# EAGLE board Máquina café (EAGLE 9.7.0)

Size 221.12 x 183.29 mm. Coordinates in mm from the lower left corner, seen from the top.
Outline: 0,0 221.12,0 221.12,183.29 0,183.29 0,0
Copper layers (1*16): Top 0.035mm / dielectric 1.5mm / Bottom 0.035mm
Design rules "default": minimum track width 6mil, minimum drill 0.35mm, track to track 6mil, track to pad 6mil, pad to pad 6mil, via to via 6mil, smd to smd 6mil, copper to edge 40mil, drill to drill 6mil, minimum pad ring 10mil, minimum via ring 8mil, stop-mask expansion 4mil, vias tented up to drill 0mil, thermal gap 10mil

## Footprints (pad centres in the part's own frame; a part is rotated, then mirrored left to right if it is on the bottom)
LEDRD254W60D565H860B = drill 0.981 pad 1.581: 1 -1.27,0; 2 1.27,0
RESAD1016W63L850D250B = drill 0.83 pad 1.43: 1 -5.08,0; 2 5.08,0
SWITCH-MOMENTARY-PTH-6.5MM = drill 1.016 pad 1.88: 1 -3.251,2.261; 2 3.251,2.261; 3 -3.251,-2.261; 4 3.251,-2.261
ARDUINO-UNO-R3-SHIELD = drill 1.016 pad 1.88: 3.3V 24.13,-2.54; 5V 24.13,0; A0 24.13,12.7; A1 24.13,15.24; A2 24.13,17.78; A3 24.13,20.32; A4 24.13,22.86; A5 24.13,25.4; AREF -24.13,-13.97; D2 -24.13,20.32; D3 -24.13,17.78; D4 -24.13,15.24; D5 -24.13,12.7; D6 -24.13,10.16; D7 -24.13,7.62; D8 -24.13,3.81; D9 -24.13,1.27; D10 -24.13,-1.27; D11 -24.13,-3.81; D12 -24.13,-6.35; D13 -24.13,-8.89; GND@0 24.13,2.54; GND@1 24.13,5.08; GND@2 -24.13,-11.43; IOREF 24.13,-7.62; NC 24.13,-10.16; RES 24.13,-5.08; RX -24.13,25.4; SCL -24.13,-19.05; SDA -24.13,-16.51; TX -24.13,22.86; VIN 24.13,7.62
DIP762W53P254L1969H508Q14B = drill 0.743 pad 1.343: 1 -3.81,7.62; 2 -3.81,5.08; 3 -3.81,2.54; 4 -3.81,0; 5 -3.81,-2.54; 6 -3.81,-5.08; 7 -3.81,-7.62; 8 3.81,-7.62; 9 3.81,-5.08; 10 3.81,-2.54; 11 3.81,0; 12 3.81,2.54; 13 3.81,5.08; 14 3.81,7.62

## Placement (x,y rotation side)
D1  RED  [LEDRD254W60D565H860B]  190.45,100.82 0 top
D2  RED  [LEDRD254W60D565H860B]  213.52,21.67 0 top
R1  1k  [RESAD1016W63L850D250B]  184.1,98.28 0 top
R2  1k  [RESAD1016W63L850D250B]  212.04,88.12 90 top
R3  1k  [RESAD1016W63L850D250B]  123.35,8.97 270 top
R4  1k  [RESAD1016W63L850D250B]  214.79,8.97 90 top
S1  SWITCH_MOMENTARY  [SWITCH-MOMENTARY-PTH-6.5MM]  209.5,104.63 90 top
S2  SWITCH_MOMENTARY  [SWITCH-MOMENTARY-PTH-6.5MM]  113.19,25.48 90 top
U1  ARDUINO-UNO-R3-SHIELD  [ARDUINO-UNO-R3-SHIELD]  115.6,153.44 270 top
U2  ARDUINO-UNO-R3-SHIELD  [ARDUINO-UNO-R3-SHIELD]  47.88,35.3 270 top
U3  74HC74_PDIP  [DIP762W53P254L1969H508Q14B]  163.78,104.63 90 top
U4  74HC74_PDIP  [DIP762W53P254L1969H508Q14B]  143.67,25.48 90 top
U5  74HC74_PDIP  [DIP762W53P254L1969H508Q14B]  166.53,25.48 90 top
U6  74HC74_PDIP  [DIP762W53P254L1969H508Q14B]  189.39,25.48 90 top

## Library data of the parts
D1 D2 = Tinkercad; CATEGORY: Opto-Electronic; SUB-CATEGORY: LED; VALUE: LED_RED
R1-R4 S1 S2 U1-U6 = Tinkercad

## Nets
D1_A: D1.1 R1.2
U1_5V: S1.1 S1.2 U1.5V U3.1 U3.3 U3.14
U1_GND: D1.2 R2.1 U1.GND@0 U1.GND@1 U1.GND@2 U3.7
U2_5V: S2.1 S2.2 U2.5V U4.14 U5.14 U6.14
U2_GND: R3.2 R4.1 U2.GND@0 U2.GND@1 U2.GND@2 U4.7 U5.7 U6.7
U3_1Q: R1.1 U3.5
U3_D1: R2.2 S1.3 S1.4 U3.2
U4_1Q: U4.5 U5.2
U4_D1: R3.1 S2.3 S2.4 U4.2
U5_1Q: U5.5 U6.2
U6_1Q: D2.1 U6.5

## Tracks (layer width: path | path; a pad name or v marks a point on that pad's centre or on a via)
D1_A  (1 unrouted)
U1_5V  (5 unrouted)
U1_GND  (5 unrouted)
U2_5V  (5 unrouted)
U2_GND  (7 unrouted)
U3_1Q  (1 unrouted)
U3_D1  (3 unrouted)
U4_1Q  (1 unrouted)
U4_D1  (3 unrouted)
U5_1Q  (1 unrouted)
U6_1Q  (1 unrouted)